# EAGLE board Stencil HV Board Main ECU (EAGLE 9.2.2), part 1 of 2
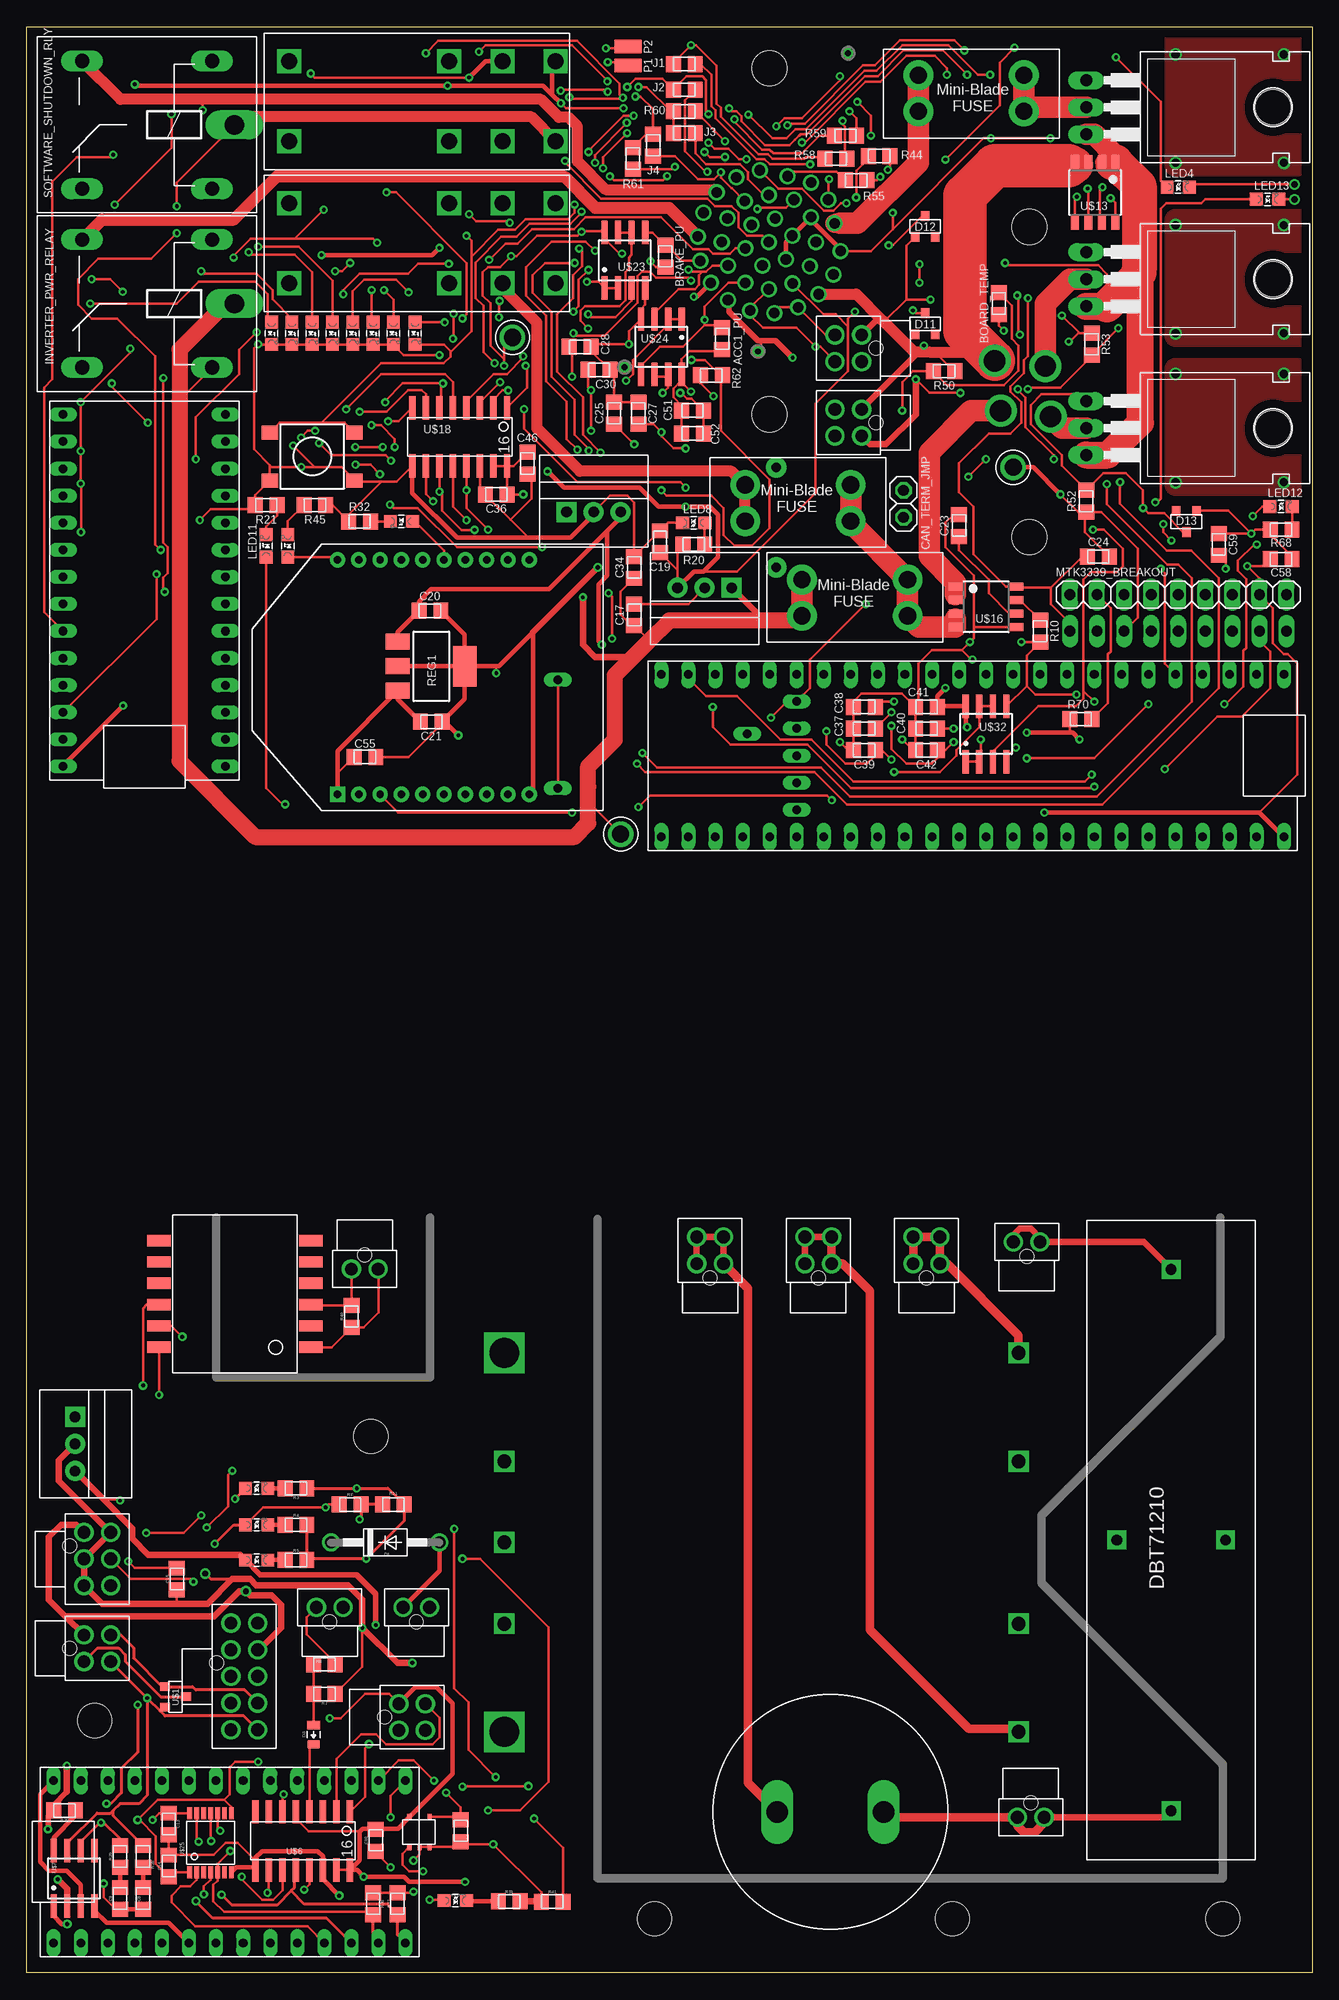
[diagram p0: board, top side]
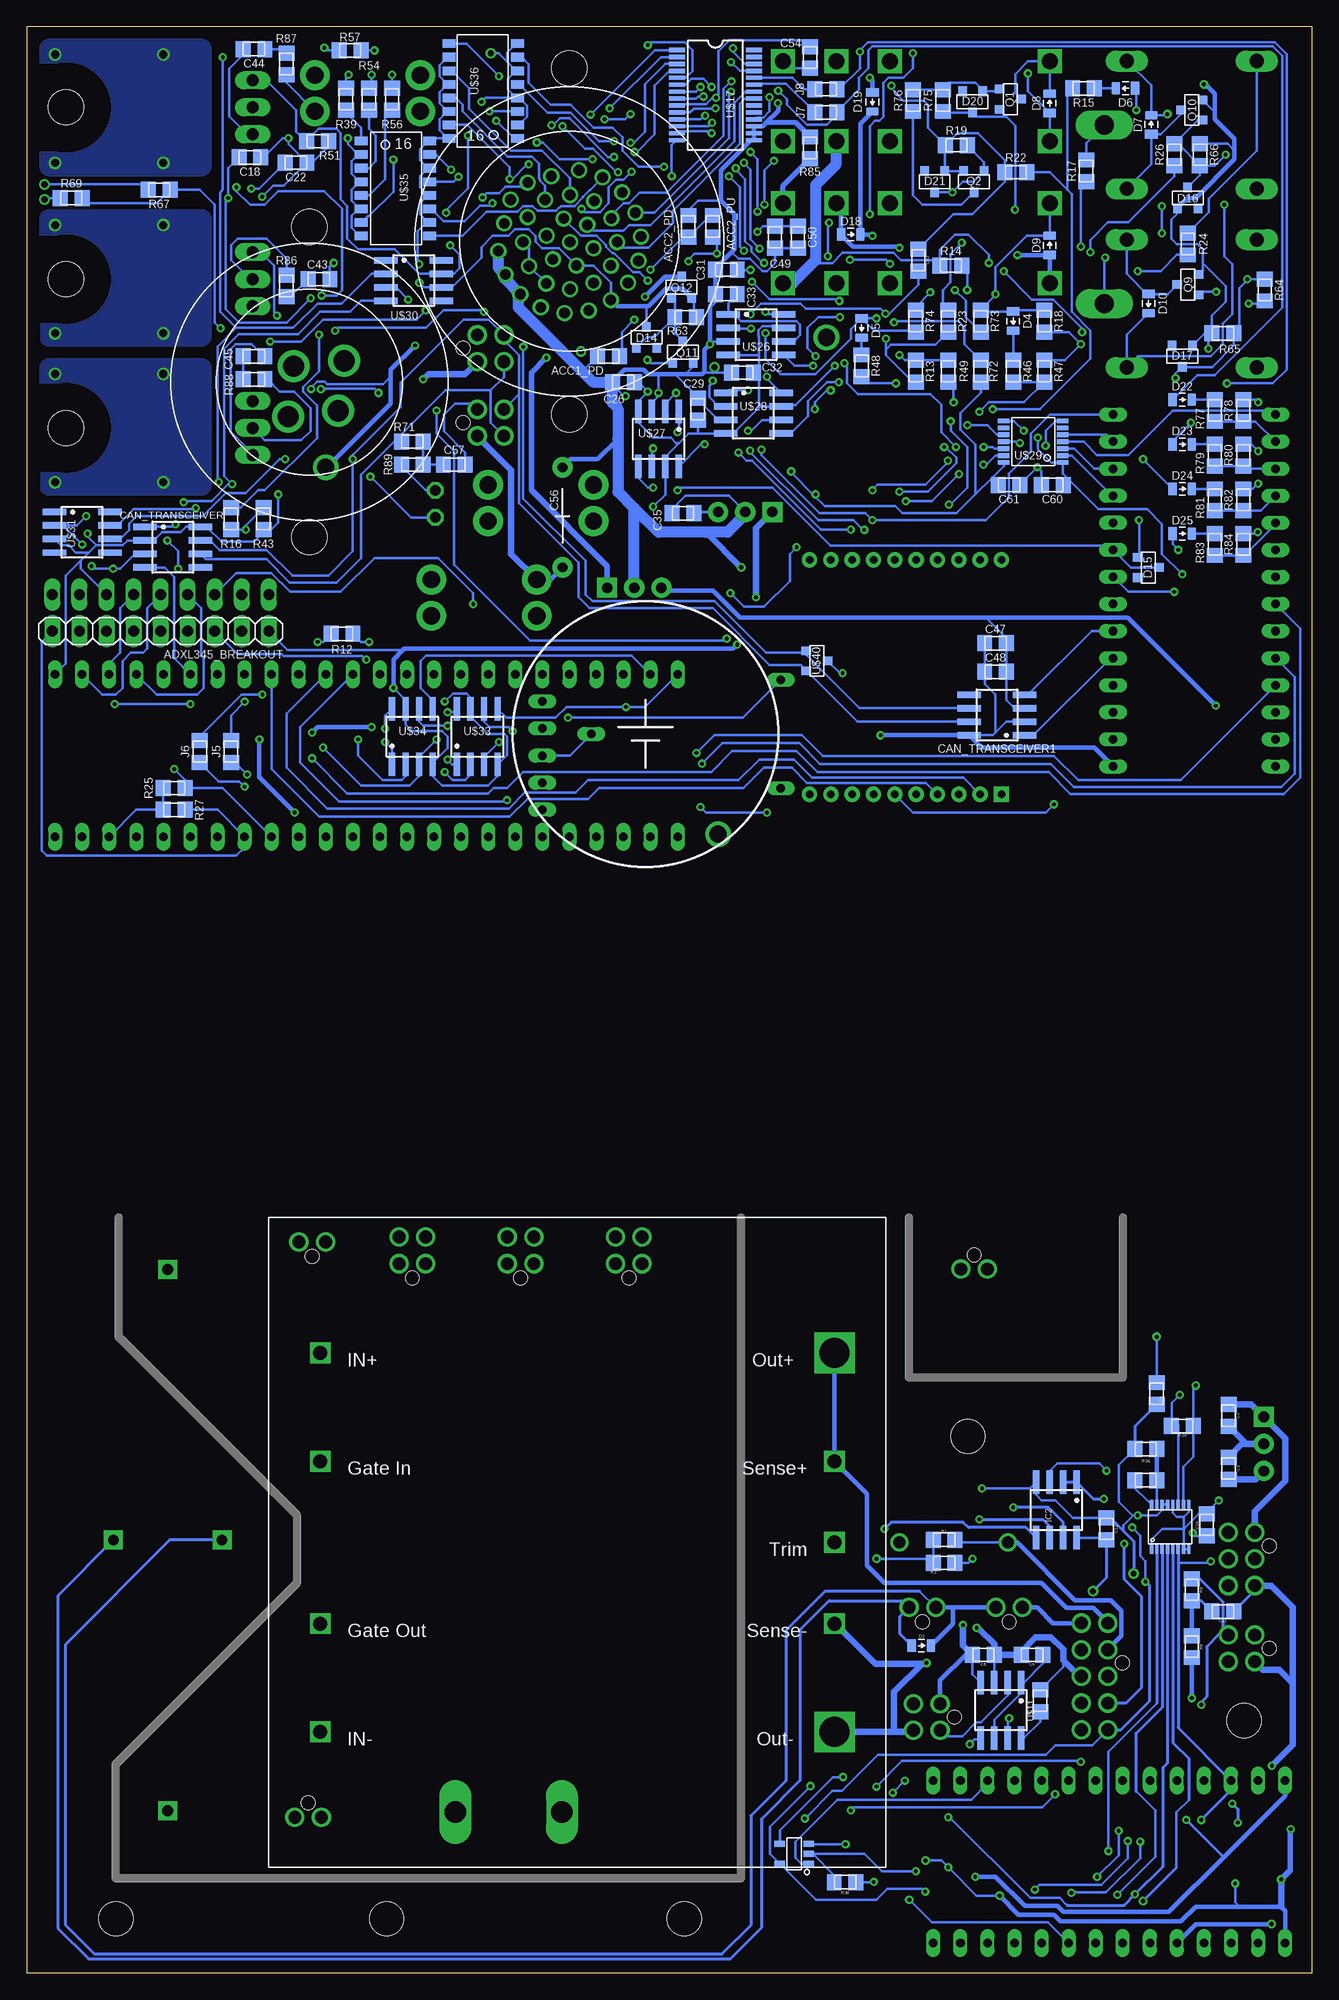
[diagram p1: board, bottom side, seen from below]

Size 120.65 x 182.63 mm. Coordinates in mm from the lower left corner, seen from the top.
Outline: 0,0 0,182.63 120.65,182.63 120.65,0 0,0
Copper layers (1*16): Top 0.035mm / dielectric 1.5mm / Bottom 0.035mm
Design rules "DRC Advanced Circuits": minimum track width 6mil, minimum drill 10mil, track to track 6mil, track to pad 6mil, pad to pad 6mil, via to via 6mil, smd to smd 6mil, copper to edge 40mil, drill to drill 6mil, minimum pad ring 10mil, minimum via ring 8mil, stop-mask expansion 4mil, vias tented up to drill 0mil, thermal gap 10mil
Net classes: 1 TS: clearance 8.5 mm to class 0; 2 ISO_SPI: clearance 8.5 mm to class 0, clearance 8.5 mm to class 1
Holes 3.2 mm at 86.87,5.08 6.4,23.67 112.27,5.08 58.93,5.08 32.31,50.34
tKeepout: area 29.3,47.3 to 35.3,53.3; area 3.4,20.7 to 9.4,26.7; area 55.9,2.1 to 61.9,8.1; area 83.9,2.1 to 89.9,8.1; area 109.3,2.1 to 115.3,8.1
bKeepout: area 109.3,2.1 to 115.3,8.1; area 83.9,2.1 to 89.9,8.1; area 55.9,2.1 to 61.9,8.1; area 3.4,20.7 to 9.4,26.7; area 29.3,47.3 to 35.3,53.3

## Footprints (pad centres in the part's own frame; a part is rotated, then mirrored left to right if it is on the bottom)
MINI-BLADE_FUSE_HOLDER = drill 1.613 pad 2.794: L1 0,3.404; L2 0,0; R1 9.906,3.404; R2 9.906,0
0805 = smd 1.4 x 1.5: 1 -1.025,0; 2 1.025,0
1X09 = drill 1.016 long: 1 -8.89,0; 2 -6.35,0; 3 -3.81,0; 4 -1.27,0; 5 1.27,0; 6 3.81,0; 7 6.35,0; 8 8.89,0; 9 11.43,0
LED-805 = smd 1.2 x 1.2: A 0,-1.05; C 0,1.05
RELAY_DPDT = drill 1.5 square: 2 10.008,0; 3 5.004,0; 4 0,0; 5 0,7.493; 6 5.004,7.493; 7 10.008,7.493; COIL+ 25.019,0; COIL- 25.019,7.493
LLS2V221MELZ = drill 2 long: P$1 -5,0; P$2 5,0
CAP-PTH-LARGE = drill 0.9 pad 1.905: 1 -4.826,0; 2 4.572,0
1X02_SLIM = drill 1.016 octagon: 1 -1.27,0; 2 1.27,0
SOIC-08 = smd 0.6 x 2.2: 1 -1.905,-2.6; 2 -0.635,-2.6; 3 0.635,-2.6; 4 1.905,-2.6; 5 1.905,2.6; 6 0.635,2.6; 7 -0.635,2.6; 8 -1.905,2.6
NANO-FIT_VERTICAL-4 = drill 1.2: P$1 -1.25,0; P$2 1.25,0; P$3 -1.25,2.5; P$4 1.25,2.5 | hole 1.3: 0,-1.34
DO-41 = drill 1.118: A 5.08,0; C -5.08,0
0805_D = smd 0.8 x 1.2: A -0.9,0; C 0.9,0
SOT23 = smd 0.8 x 0.9: 1 -0.95,-1; 2 0.95,-1; 3 0,1
NANO-FIT_VERTICAL-2 = drill 1.2: P$1 -1.25,0; P$2 1.25,0 | hole 1.3: 0,-1.34
OKI-78SR = drill 1 pad 1.88 square: 1 -2.54,0 | drill 1 pad 1.88: 2 0,0; 3 2.54,0
NANO-FIT_VERTICAL-6 = drill 1.2: P$1 -2.5,0; P$2 0,0; P$3 2.5,0; P$4 -2.5,2.5; P$5 0,2.5; P$6 2.5,2.5 | hole 1.3: -1.25,-1.34
ZF112 = drill 1.321 long: 1 4.064,14.884; 2 4.064,2.896; O 16.256,14.884; S 16.256,2.896 | drill 1.803 long: P 1.956,8.89
NANO-FIT_VERTICAL-10 = drill 1.2: P$1 -5,0; P$2 -2.5,0; P$3 0,0; P$4 2.5,0; P$5 5,0; P$6 -5,2.5; P$7 -2.5,2.5; P$8 0,2.5; P$9 2.5,2.5; P$10 5,2.5 | hole 1.3: -1.27,-1.34
SOLDER_PAD_XSMALL = smd 2.54 x 1.27: P$1 0,0
SOT223 = smd 1.5 x 2.235: 1 -2.3,-3.15; 2 0,-3.15; 3 2.3,-3.15 | smd 3.8 x 2.2: 4 0,3.15
TACTILE_SWITCH_SMD_6.2MM_TALL = smd 1.55 x 1.3: A1 -3.975,-2.25; A2 3.975,-2.25; B1 -3.975,2.25; B2 3.975,2.25
HM2102NLT = smd 1.067 x 2.184: P$1 0,0; P$2 2,0; P$3 4,0; P$4 6,0; P$5 8,0; P$6 10,0; P$7 10,14.25; P$8 8,14.25; P$9 6,14.25; P$10 4,14.25; P$11 2,14.25; P$12 0,14.25
SOT-23-5 = smd 1 x 0.55: 1 -1.35,0.95; 2 -1.35,0; 3 -1.35,-0.95; 4 1.35,-0.95; 5 1.35,0.95
DBT71210 = drill 1 pad 1.778 square: COIL+ 30,-13; COIL- 30,-2.8; CONTACT1 55.4,-7.9; CONTACT2 4.6,-7.9
HV_DCDC_VI-J71-CZ = drill 1.3 square: 1VIN+ 5.08,-12.7; 2GATEIN 5.08,-22.86; 3GATEOUT 5.08,-38.1; 4VIN- 5.08,-48.26; 6SENSE+ 53.34,-22.86; 7TRIM 53.34,-30.48; 8SENSE- 53.34,-38.1 | drill 2.8 square: 5VOUT+ 53.34,-12.7; 9VOUT- 53.34,-48.26
SOIC-16 = smd 0.6 x 2.2: 1 -4.445,-2.794; 2 -3.175,-2.794; 3 -1.905,-2.794; 4 -0.635,-2.794; 5 0.635,-2.794; 6 1.905,-2.794; 7 3.175,-2.794; 8 4.445,-2.794; 9 4.445,2.667; 10 3.175,2.667; 11 1.905,2.667; 12 0.635,2.667; 13 -0.635,2.667; 14 -1.905,2.667; 15 -3.175,2.667; 16 -4.445,2.667
MSOP-16 = smd 0.305 x 0.889: 1 -0.1,-0.5; 2 0.4,-0.5; 3 0.9,-0.5; 4 1.4,-0.5; 5 1.9,-0.5; 6 2.4,-0.5; 7 2.9,-0.5; 8 3.4,-0.5; 9 3.4,3.7; 10 2.9,3.7; 11 2.4,3.7; 12 1.9,3.7; 13 1.4,3.7; 14 0.9,3.7; 15 0.4,3.7; 16 -0.1,3.7
TEENSY_3.2_SIMPLE = drill 0.8 long: 3.3V 16.51,29.21; A0 16.51,3.81; A1 16.51,6.35; A2 16.51,8.89; A3 16.51,11.43; A4 16.51,13.97; A5 16.51,16.51; A6 16.51,19.05; A7 16.51,21.59; A8 16.51,24.13; A9 16.51,26.67; AGND 16.51,31.75; D0(RX1) 1.27,31.75; D1(TX1) 1.27,29.21; D2 1.27,26.67; D3(CANTX) 1.27,24.13; D4(CANRX) 1.27,21.59; D5 1.27,19.05; D6 1.27,16.51; D7(RX3) 1.27,13.97; D8(TX3) 1.27,11.43; D9(RX2) 1.27,8.89; D10(TX2) 1.27,6.35; D11 1.27,3.81; D12 1.27,1.27; D13 16.51,1.27; GND 1.27,34.29; VIN 16.51,34.29
SOT23-5 = smd 0.61 x 0.406: EN -2.794,0; GND -2.794,0.94; VCC 0,1.905; WDI 0,0; WDO -2.794,1.905
SOP8 = smd 0.76 x 1.27: 1 -1.905,-2.86; 2 -0.635,-2.86; 3 0.635,-2.86; 4 1.905,-2.86; 5 1.905,2.86; 6 0.635,2.86; 7 -0.635,2.86; 8 -1.905,2.86
TEENSY_3.5_EXT = drill 0.8 long: 3.3V 16.51,54.61; 3.3V_1 1.27,24.13; 3.3V_2 6.35,13.97; A0 16.51,29.21; A1 16.51,31.75; A2 16.51,34.29; A3 16.51,36.83; A4 16.51,39.37; A5 16.51,41.91; A6 16.51,44.45; A7 16.51,46.99; A8 16.51,49.53; A9 16.51,52.07; A12 1.27,3.81; A13 1.27,1.27; A14 16.51,1.27; A15 16.51,3.81; A16 16.51,6.35; A17 16.51,8.89; A18 16.51,11.43; A19 16.51,13.97; A20 16.51,16.51; A21 16.51,19.05; A22 16.51,21.59; AGND 16.51,57.15; D0(RX1) 1.27,57.15; D1(TX1) 1.27,54.61; D2 1.27,52.07; D3(CANTX) 1.27,49.53; D4(CANRX) 1.27,46.99; D5 1.27,44.45; D6 1.27,41.91; D7(RX3) 1.27,39.37; D8(TX3) 1.27,36.83; D9(RX2) 1.27,34.29; D10(TX2) 1.27,31.75; D11 1.27,29.21; D12 1.27,26.67; D13 16.51,26.67; D24 1.27,21.59; D25 1.27,19.05; D26 1.27,16.51; D27 1.27,13.97; D28 1.27,11.43; D29 1.27,8.89; D30 1.27,6.35; GND 1.27,59.69; GND_1 16.51,24.13; GND_2 8.89,13.97; PROG 11.43,13.97; RST 13.97,13.97; VBAT 3.81,13.97; VIN 16.51,59.69
XBEE = drill 0.7 pad 1.422 square: 1 -11,5.5 | drill 0.7 pad 1.422: 2 -11,3.5; 3 -11,1.5; 4 -11,-0.5; 5 -11,-2.5; 6 -11,-4.5; 7 -11,-6.5; 8 -11,-8.5; 9 -11,-10.5; 10 -11,-12.5; 11 11,-12.5; 12 11,-10.5; 13 11,-8.5; 14 11,-6.5; 15 11,-4.5; 16 11,-2.5; 17 11,-0.5; 18 11,1.5; 19 11,3.5; 20 11,5.5
SSOP28 = smd 0.4 x 1.5: 1 -4.225,-3.625; 2 -3.575,-3.625; 3 -2.925,-3.625; 4 -2.275,-3.625; 5 -1.625,-3.625; 6 -0.975,-3.625; 7 -0.325,-3.625; 8 0.325,-3.625; 9 0.975,-3.625; 10 1.625,-3.625; 11 2.275,-3.625; 12 2.925,-3.625; 13 3.575,-3.625; 14 4.225,-3.625; 15 4.225,3.625; 16 3.575,3.625; 17 2.925,3.625; 18 2.275,3.625; 19 1.625,3.625; 20 0.975,3.625; 21 0.325,3.625; 22 -0.325,3.625; 23 -0.975,3.625; 24 -1.625,3.625; 25 -2.275,3.625; 26 -2.925,3.625; 27 -3.575,3.625; 28 -4.225,3.625
TO-220-H-HOLE = drill 1.118 long: 1 -2.54,-6.35; 2 0,-6.35; 3 2.54,-6.35 | hole 3.302: 0,11.176
CR-2450/G1AN = drill 0.8 long: +_0 -5.08,12.7; +_1 5.08,12.7; - 0,-5.08
TSSOP-14 = smd 0.45 x 1.1: 1 -1.958,-2.618; 2 -1.308,-2.618; 3 -0.657,-2.618; 4 -0.007,-2.618; 5 0.642,-2.618; 6 1.292,-2.618; 7 1.942,-2.618; 8 1.942,2.918; 9 1.292,2.918; 10 0.642,2.918; 11 -0.007,2.918; 12 -0.657,2.918; 13 -1.308,2.918; 14 -1.958,2.918
11-11F1 = smd 0.8 x 1.2: 1 -4.445,-3.277; 2 -3.175,-3.277; 3 -1.905,-3.277; 4 -0.635,-3.277; 5 0.635,-3.277; 6 1.905,-3.277; 7 3.175,-3.277; 8 4.445,-3.277; 9 4.445,3.15; 10 3.175,3.15; 11 1.905,3.15; 12 0.635,3.15; 13 -0.635,3.15; 14 -1.905,3.15; 15 -3.175,3.15; 16 -4.445,3.15
TEST_POINT = drill 1.6: P$1 0,0
AUTOSPORT_14-35 = drill 1: P$1 1.143,6.655; P$2 3.124,5.512; P$3 5.359,4.064; P$4 6.452,2.032; P$5 6.756,-0.254; P$6 6.274,-2.489; P$7 5.08,-4.445; P$8 3.302,-5.893; P$9 1.143,-6.655; P$10 -1.143,-6.655; P$11 -3.302,-5.893; P$12 -5.08,-4.445; P$13 -6.274,-2.489; P$14 -6.756,-0.254; P$15 -6.452,2.032; P$16 -5.359,4.064; P$17 -3.124,5.512; P$18 -1.143,6.655; P$19 1.143,4.369; P$20 3.124,3.023; P$21 4.318,1.016; P$22 4.318,-1.27; P$23 3.124,-3.226; P$24 1.143,-4.369; P$25 -1.143,-4.369; P$26 -3.124,-3.226; P$27 -4.318,-1.27; P$28 -4.318,1.016; P$29 -3.124,3.023; P$30 -1.143,4.369; P$31 1.143,1.88; P$32 2.286,-0.102; P$33 1.143,-2.083; P$34 -1.143,-2.083; P$35 -2.286,-0.102; P$36 -1.143,1.88; P$37 0,-0.102 | hole 3.3: -11.491,-11.491; 11.491,11.491
AUTOSPORT_12-04 = drill 2: P$1 0,3.81; P$2 3.708,0.889; P$3 0,-2.108; P$4 -3.708,0.889 | hole 3.3: -10.288,-10.288; 10.288,10.288

## Placement (x,y rotation side)
5ABOARDFUSE  [MINI-BLADE_FUSE_HOLDER]  82.68,130.73 180 top
5AFUSE  [MINI-BLADE_FUSE_HOLDER]  83.69,174.68 0 top
5ASHUTDOWNFUSE  [MINI-BLADE_FUSE_HOLDER]  77.34,139.62 180 top
ACC1_PD  10k  [0805]  66.04,151.69 180 bottom
ACC1_PU  10k  [0805]  65.28,153.34 270 top
ACC2_PD  10k  [0805]  58.55,163.88 90 bottom
ACC2_PU  10k  [0805]  56.26,163.88 270 bottom
ADXL345_BREAKOUT  [1X09]  106.81,125.91 180 bottom
BMS-OK  GREEN  [LED-805]  21.59,42.04 270 top
BMS_SHUTDOWN_RLY  RT424012  [RELAY_DPDT]  49.66,179.37 180 top
BOARD_TEMP  THERMISTOR_NCP210805  [0805]  91.24,156.64 90 top
BRAKE_PU  10k  [0805]  59.94,161.09 270 top
C1  180µF  [LLS2V221MELZ]  75.43,15.1 180 top
C2  10uF  [0805]  7.85,52.3 270 bottom
C3  10uF  [0805]  7.85,47.35 90 bottom
C4  27pF  [0805]  14.61,54.36 270 bottom
C5  0.1uF  [0805]  30.86,29.84 0 bottom
C6  0.1uF  [0805]  26.29,29.84 180 bottom
C7  530pF  [0805]  25.53,25.53 90 bottom
C8  560pF  [0805]  10.92,6.99 90 top
C9  560pF  [0805]  8.76,6.99 90 top
C10  0.1uF  [0805]  32.77,12.45 270 top
C11  4.7nF  [0805]  8.38,33.91 180 bottom
C12  0.1uF  [0805]  19.3,41.66 90 bottom
C13  0.1uF  [0805]  13.34,13.97 270 top
C14  0.1uF  [0805]  13.34,10.03 90 top
C15  0.1uF  [0805]  14.1,36.96 90 top
C16  0.1uF  [0805]  9.91,42.04 90 bottom
C17  10uF  [0805]  57.02,127.43 270 top
C18  0.1uF  [0805]  99.69,170.36 0 bottom
C19  10uF  [0805]  59.44,134.29 270 top
C20  1uF  [0805]  37.85,127.81 0 top
C21  1uF  [0805]  37.97,117.4 180 top
C22  47nF  [0805]  95.38,169.85 0 bottom
C23  47nF  [0805]  87.5,135.81 90 top
C24  0.1uF  [0805]  100.58,132.89 0 top
C25  47nF  [0805]  55.12,146.35 90 top
C26  .1uF  [0805]  64.64,149.28 180 bottom
C27  .1uF  [0805]  57.4,146.35 270 top
C28  47nF  [0805]  51.94,152.58 0 top
C29  .1uF  [0805]  57.66,146.74 90 bottom
C30  .1uF  [0805]  53.72,150.42 180 top
C31  47nF  [0805]  54.99,159.82 180 bottom
C32  .1uF  [0805]  53.47,150.16 180 bottom
C33  .1uF  [0805]  54.99,157.53 0 bottom
C34  10uF  [0805]  57.02,131.88 270 top
C35  10uF  [0805]  59.05,136.96 0 bottom
C36  1uF  [0805]  44.07,138.73 0 top
C37  470pF  [0805]  78.61,116.76 180 top
C38  .1uF  [0805]  78.61,118.8 180 top
C39  .1uF  [0805]  78.61,114.73 0 top
C40  470pF  [0805]  84.45,116.76 180 top
C41  .1uF  [0805]  84.45,118.8 180 top
C42  .1uF  [0805]  84.45,114.73 0 top
C43  [0805]  93.22,158.93 0 bottom
C44  [0805]  99.31,180.52 180 bottom
C45  [0805]  99.31,151.69 0 bottom
C46  0.1uF  [0805]  46.99,141.66 90 top
C47  1uF  [0805]  29.72,124.76 0 bottom
C48  .1uF  [0805]  29.72,122.1 0 bottom
C49  1uF  [0805]  50.42,162.86 90 bottom
C50  .1uF  [0805]  48.26,162.86 90 bottom
C51  1uF  [0805]  62.48,146.61 0 top
C52  .1uF  [0805]  62.48,144.45 0 top
C53  1uF  [0805]  36.96,160.71 270 bottom
C54  0.1uF  [0805]  47.12,179.73 270 bottom
C55  0.1uF  [0805]  31.75,114.1 0 top
C56  470uF  [CAP-PTH-LARGE]  70.36,136.7 90 bottom
C57  4.7nF  [0805]  80.52,141.53 0 bottom
C58  1uF  [0805]  117.73,132.64 180 top
C59  .1uF  [0805]  111.89,134.04 270 top
C60  .1uF  [0805]  24.38,139.62 180 bottom
C61  .1uF  [0805]  28.45,139.62 0 bottom
CAN_TERM_JMP  M02_SLIM  [1X02_SLIM]  82.3,137.85 90 top
CAN_TRANSCEIVER  MCP2551  [SOIC-08]  106.93,133.78 270 bottom
CAN_TRANSCEIVER1  MCP2551  [SOIC-08]  29.59,118.03 90 bottom
CURRENT  CURRENT  [NANO-FIT_VERTICAL-4]  34.92,24 270 top
D1  DIODE  [DO-41]  33.66,40.39 0 top
D2  TS4148 RYG  [0805_D]  36.68,30.71 0 bottom
D3  TS4148 RYG  [0805_D]  26.92,22.35 270 top
D4  TS4148 RYG  [0805_D]  28.07,154.99 270 bottom
D5  TS4148 RYG  [0805_D]  42.29,154.36 270 bottom
D6  TS4148 RYG  [0805_D]  17.53,176.83 180 bottom
D7  TS4148 RYG  [0805_D]  15.11,173.43 90 bottom
D8  TS4148 RYG  [0805_D]  24.64,175.44 90 bottom
D9  TS4148 RYG  [0805_D]  24.64,162.1 90 bottom
D10  TS4148 RYG  [0805_D]  15.37,156.64 270 bottom
D11  MMBZ5246BLT1G  [SOT23]  84.33,154.74 0 top
D12  MMBZ5246BLT1G  [SOT23]  84.33,163.88 0 top
D13  MMBZ5246BLT1G  [SOT23]  108.84,136.19 180 top
D14  MMBZ5246BLT1G  [SOT23]  62.48,153.47 0 bottom
D15  MMBZ5246BLT1G  [SOT23]  15.37,131.88 270 bottom
D16  MMBZ5246BLT1G  [SOT23]  11.68,166.55 0 bottom
D17  MMBZ5246BLT1G  [SOT23]  12.19,151.69 180 bottom
D18  TS4148 RYG  [0805_D]  43.31,163.12 0 bottom
D19  TS4148 RYG  [0805_D]  41.27,175.56 270 bottom
D20  MMBZ5246BLT1G  [SOT23]  31.88,175.56 180 bottom
D21  MMBZ5246BLT1G  [SOT23]  35.43,168.07 180 bottom
D22  TS4148 RYG  [0805_D]  12.19,147.62 0 bottom
D23  TS4148 RYG  [0805_D]  12.19,143.43 0 bottom
D24  TS4148 RYG  [0805_D]  12.19,139.24 0 bottom
D25  TS4148 RYG  [0805_D]  12.19,135.05 0 bottom
DISCH+  DISCHARGE+  [NANO-FIT_VERTICAL-2]  93.85,68.58 0 top
HV+FUSED_1A-IMD+  HV+  [NANO-FIT_VERTICAL-4]  84.45,66.55 0 top
HV+UNFUSED  HV+UNFUSED  [NANO-FIT_VERTICAL-2]  94.23,14.61 180 top
HV-FUSED_1A-IMD-  HV-  [NANO-FIT_VERTICAL-4]  74.3,66.55 0 top
HV-UNFUSED_DISCHARGE-  HV-UNFUSED  [NANO-FIT_VERTICAL-4]  64.14,66.55 0 top
IC1  OKI-78SR-5  [OKI-78SR]  4.55,49.63 270 top
IC2  NE5532SOIC  [SOIC-08]  24,43.43 180 bottom
IMD  CONNECTOR-6NANO-FIT_VERTICAL-6  [NANO-FIT_VERTICAL-6]  5.38,38.84 270 top
IMD-OK  YELLOW  [LED-805]  21.59,45.47 270 top
IMD_SHUTDOWN_RLY  RT424009  [RELAY_DPDT]  49.66,166.04 180 top
INTERLOCK  INTERLOCK  [NANO-FIT_VERTICAL-2]  28.45,34.29 0 top
INVERTER_PWR_RELAY  G5LE  [ZF112]  21.46,165.53 180 top
ISO_SPI  ISO_SPI  [NANO-FIT_VERTICAL-2]  31.73,66.04 180 top
J1  JUMPER  [0805]  61.72,179.12 180 top
J2  JUMPER  [0805]  61.72,176.71 180 top
J3  JUMPER  [0805]  61.72,172.64 180 top
J4  JUMPER  [0805]  58.8,171.5 90 top
J5  JUMPER  [0805]  101.47,114.6 90 bottom
J6  JUMPER  [0805]  104.39,114.6 90 bottom
J7  JUMPER  [0805]  45.64,174.57 180 bottom
J8  JUMPER  [0805]  45.64,176.76 180 bottom
LED  BLUE  [LED-805]  40.23,6.78 270 top
LED1  White  [LED-805]  36.45,153.85 180 top
LED3  Green  [LED-805]  30.61,153.85 180 top
LED4  Red  [LED-805]  108.08,167.56 270 top
LED5  Yellow  [LED-805]  32.51,153.85 180 top
LED6  Red  [LED-805]  22.99,153.85 180 top
LED7  Green  [LED-805]  28.7,153.85 180 top
LED8  Purple  [LED-805]  62.61,136.07 90 top
LED9  Yellow  [LED-805]  34.42,153.85 180 top
LED10  Red  [LED-805]  35.18,136.19 90 top
LED11  Green  [LED-805]  22.48,133.91 0 top
LED12  Red  [LED-805]  117.73,137.59 270 top
LED13  Red  [LED-805]  116.46,166.42 270 top
LED14  Blue  [LED-805]  24.51,133.91 0 top
LED17  Red  [LED-805]  26.8,153.85 180 top
LED18  Red  [LED-805]  24.89,153.85 180 top
MAIN  MAIN  [NANO-FIT_VERTICAL-10]  19.18,27.81 270 top
MTK3339_BREAKOUT  [1X09]  106.81,129.34 0 top
ON-LED  PURPLE  [LED-805]  21.59,38.73 270 top
P1  SOLDER_PAD  [SOLDER_PAD_XSMALL]  56.44,178.97 0 top
P2  SOLDER_PAD  [SOLDER_PAD_XSMALL]  56.44,180.75 0 top
POWER  POWER  [NANO-FIT_VERTICAL-4]  5.38,30.45 270 top
Q1  P-CHANNEL_MOSFET_DMP3099L-7  [SOT23]  28.32,175.82 270 bottom
Q2  [SOT23]  31.75,168.07 180 bottom
Q9  [SOT23]  11.68,158.42 90 bottom
Q10  [SOT23]  11.3,174.8 90 bottom
Q11  [SOT23]  59.05,152.07 0 bottom
Q12  P-CHANNEL_MOSFET_DMP3099L-7  [SOT23]  59.18,158.17 0 bottom
R1  43k  [0805]  34.54,40.64 180 bottom
R2  12k  [0805]  34.54,38.48 180 bottom
R3  820  [0805]  25.27,45.47 180 top
R4  5k  [0805]  25.27,42.04 0 top
R5  270  [0805]  25.27,38.73 0 top
R6  43k  [0805]  27.94,28.96 180 top
R7  12k  [0805]  27.94,26.16 180 top
R8  60  [0805]  11.3,30.61 270 bottom
R9  60  [0805]  11.3,35.94 90 bottom
R10  1K  [0805]  95.12,125.91 270 top
R11  1k  [0805]  34.42,43.94 180 top
R12  2K  [0805]  91.06,125.65 180 bottom
R13  12k  [0805]  37.21,150.29 90 bottom
R14  2k  [0805]  33.91,160.2 0 bottom
R15  43k  [0805]  21.46,176.83 180 bottom
R16  1K  [0805]  101.47,136.45 270 bottom
R17  20k  [0805]  21.21,169.09 270 bottom
R18  2k  [0805]  25.15,154.99 270 bottom
R19  10k  [0805]  33.4,171.5 180 bottom
R20  270  [0805]  62.61,134.04 0 top
R21  33  [0805]  22.48,137.72 0 top
R22  12k  [0805]  27.81,168.96 180 bottom
R23  43k  [0805]  34.16,154.99 270 bottom
R24  6.8k  [0805]  11.68,162.23 270 bottom
R25  4.7k  [0805]  106.81,111.18 180 bottom
R26  1.2K  [0805]  12.95,170.61 270 bottom
R27  4.7k  [0805]  106.81,109.14 180 bottom
R28  100  [0805]  10.92,10.92 90 top
R29  100  [0805]  8.76,10.92 90 top
R30  1k  [0805]  3.56,15.24 0 top
R31  43  [0805]  45.29,6.71 0 top
R32  1.2k  [0805]  31.24,136.19 0 top
R33  1k  [0805]  15.62,46.23 0 bottom
R34  1k  [0805]  15.62,49.15 180 bottom
R35  120  [0805]  12.19,51.31 180 bottom
R36  2k  [0805]  32.51,6.48 270 top
R37  2k  [0805]  34.8,6.48 270 top
R38  430  [0805]  43.84,8.51 180 bottom
R39  150  [0805]  90.68,175.82 270 bottom
R40  100  [0805]  30.48,61.59 90 top
R41  2k  [0805]  49.33,6.68 180 top
R42  10k  [0805]  40.74,13.34 270 top
R43  2K  [0805]  98.42,136.45 90 bottom
R44  0  [0805]  80.01,170.48 180 top
R45  0  [0805]  27.05,137.72 180 top
R46  43k  [0805]  28.07,150.29 270 bottom
R47  12k  [0805]  25.15,150.29 90 bottom
R48  43k  [0805]  42.29,150.8 270 bottom
R49  12k  [0805]  34.16,150.29 90 bottom
R50  10k  [0805]  86.11,150.29 180 top
R51  10k  [0805]  93.34,171.88 180 bottom
R52  10k  [0805]  99.44,138.1 90 top
R53  10k  [0805]  99.95,152.83 90 top
R54  150  [0805]  88.52,175.82 270 bottom
R55  0  [0805]  77.85,168.2 180 top
R56  150  [0805]  86.36,175.82 270 bottom
R57  150  [0805]  90.3,180.39 180 bottom
R58  150  [0805]  75.95,170.23 0 top
R59  150  [0805]  76.83,172.39 0 top
R60  150  [0805]  61.72,174.68 0 top
R61  150  [0805]  56.9,170.26 270 top
R62  10k  [0805]  64.26,149.91 0 top
R63  10k  [0805]  58.8,155.37 180 bottom
R64  1.2k  [0805]  4.45,157.91 270 bottom
R65  10k  [0805]  8.38,153.85 180 bottom
R66  10k  [0805]  10.54,170.61 90 bottom
R67  1.2k  [0805]  108.2,167.31 0 bottom
R68  1.2k  [0805]  117.73,135.43 180 top
R69  1.2k  [0805]  116.46,166.55 0 bottom
R70  10k  [0805]  98.93,117.65 0 top
R71  60  [0805]  84.45,143.69 0 bottom
R72  5.1k  [0805]  31.11,150.29 90 bottom
R73  2k  [0805]  31.11,154.99 270 bottom
R74  33  [0805]  37.21,154.99 90 bottom
R75  10k  [0805]  34.67,175.69 90 bottom
R76  1k  [0805]  37.47,175.69 90 bottom
R77  43k  [0805]  9.14,146.61 270 bottom
R78  12k  [0805]  6.48,146.61 90 bottom
R79  43k  [0805]  9.14,142.42 270 bottom
R80  12k  [0805]  6.48,142.42 90 bottom
R81  43k  [0805]  9.14,138.23 270 bottom
R82  12k  [0805]  6.48,138.23 90 bottom
R83  43k  [0805]  9.14,134.04 270 bottom
R84  12k  [0805]  6.48,134.04 90 bottom
R85  20  [0805]  47.14,171.25 90 bottom
R86  [0805]  96.27,158.29 270 bottom
R87  [0805]  96.27,179.12 90 bottom
R88  [0805]  99.31,149.53 180 bottom
R89  60  [0805]  84.45,141.53 180 bottom
REG  5V  [OKI-78SR]  63.63,129.97 180 top
REG1  LM3940  [SOT223]  37.97,122.61 270 top
REG3  5V  [OKI-78SR]  53.21,137.08 0 top
RELAYS  RELAYS  [NANO-FIT_VERTICAL-2]  36.58,34.29 0 top
RF  2k  [0805]  30.35,43.94 180 top
S1  [TACTILE_SWITCH_SMD_6.2MM_TALL]  26.8,142.29 180 top
SOFTWARE_SHUTDOWN_RLY  G5LE  [ZF112]  21.46,182.3 180 top
U$1  CDSOT23-T24CAN-Q  [SOT23]  13.97,25.91 270 top
U$2  HM2102NLT  [HM2102NLT]  26.67,58.71 90 top
U$3  SN74LVC1G08  [SOT-23-5]  48.62,11.18 180 bottom
U$4  [DBT71210]  115.32,70.61 270 top
U$5  HV_DCDC_VI-J71-CZ  [HV_DCDC_VI-J71-CZ]  98.17,70.87 0 bottom
U$6  MCP3208SOIC  [SOIC-16]  25.91,12.32 180 top
U$7  MCP2551  [SOIC-08]  4.45,8.86 0 top
U$8  LTC6820  [MSOP-16]  14.99,40.26 0 bottom
U$9  TEENSY_3.2_SIMPLE  [TEENSY_3.2_SIMPLE]  36.83,1.52 90 top
U$10  STWD100  [SOT23-5]  37.82,14.61 90 top
U$11  MAX7480  [SOIC-08]  29.21,24.64 180 bottom
U$12  TEENSY_3.2_SIMPLE  [TEENSY_3.2_SIMPLE]  19.94,147.5 180 top
U$13  ACS715_CURRENT_SENSOR  [SOP8]  100.28,167.06 180 top
U$14  TEENSY_3.5_EXT  [TEENSY_3.5_EXT]  58.29,123.11 270 top
U$15  XBEE  [XBEE]  34.67,121.59 90 top
U$16  ACS715_CURRENT_SENSOR  [SOP8]  90.04,128.19 270 top
U$17  MCP23S17SSOP28  [SSOP28]  56.01,176.2 270 bottom
U$18  MCP3208SOIC  [SOIC-16]  40.64,144.07 180 top
U$19  N-CHANNEL_MOSFET_IRF1324PBF  [TO-220-H-HOLE]  105.79,158.93 270 top
U$20  N-CHANNEL_MOSFET_IRF1324PBF  [TO-220-H-HOLE]  105.79,175.06 270 top
U$21  N-CHANNEL_MOSFET_IRF1324PBF  [TO-220-H-HOLE]  105.79,144.96 270 top
U$22  CR-2450/G1AN  [CR-2450/G1AN]  62.56,116.26 270 bottom
U$23  MCP6002SOIC  [SOIC-08]  56.13,160.71 0 top
U$24  MCP6002SOIC  [SOIC-08]  59.56,152.58 180 top
U$25  TXB0104TSSOP  [TSSOP-14]  17.27,12.06 0 top
U$26  [SOIC-08]  52.2,153.72 270 bottom
U$27  [SOIC-08]  61.34,143.94 180 bottom
U$28  [SOIC-08]  52.45,146.35 270 bottom
U$29  TXB0104TSSOP  [TSSOP-14]  26.04,143.69 90 bottom
U$30  MC34152  [SOIC-08]  84.33,158.8 270 bottom
U$31  MC34152  [SOIC-08]  115.44,135.18 270 bottom
U$32  MCP6002SOIC  [SOIC-08]  90.04,116.26 0 top
U$33  [SOIC-08]  78.36,116 0 bottom
U$34  [SOIC-08]  84.45,116 0 bottom
U$35  TLP291-4  [11-11F1]  85.98,167.44 270 bottom
U$36  TLP291-4  [11-11F1]  77.85,176.58 90 bottom
U$37  TEST_POINT  [TEST_POINT]  55.75,106.86 0 top
U$38  TEST_POINT  [TEST_POINT]  45.59,153.47 0 top
U$39  TEST_POINT  [TEST_POINT]  92.58,141.27 0 top
U$40  CDSOT23-T24CAN-Q  [SOT23]  46.48,123.11 270 bottom
X1  CONNECTOR-37  [AUTOSPORT_14-35]  69.72,162.48 45 bottom
X2  CONNECTOR-4AUTOSPORT  [AUTOSPORT_12-04]  94.11,149.28 225 bottom
X3  CONNECTOR-4NANO-FIT-VERTICAL-4  [NANO-FIT_VERTICAL-4]  78.36,152.45 90 top
X4  CONNECTOR-4NANO-FIT-VERTICAL-4  [NANO-FIT_VERTICAL-4]  78.36,145.47 90 top

## Library data of the parts
5ABOARDFUSE 5AFUSE 5ASHUTDOWNFUSE ACC1_PD ACC1_PU ACC2_PD ACC2_PU ADXL345_BREAKOUT BMS-OK BMS_SHUTDOWN_RLY BOARD_TEMP BRAKE_PU C1-C61 CAN_TERM_JMP CAN_TRANSCEIVER CAN_TRANSCEIVER1 CURRENT D1-D25 DISCH+ HV+FUSED_1A-IMD+ HV+UNFUSED HV-FUSED_1A-IMD- HV-UNFUSED_DISCHARGE- IC1 IC2 IMD IMD-OK IMD_SHUTDOWN_RLY INTERLOCK INVERTER_PWR_RELAY ISO_SPI J1-J8 LED LED1 LED3-LED14 LED17 LED18 MAIN MTK3339_BREAKOUT ON-LED P1 P2 POWER Q1 Q2 Q9-Q12 R1-R89 REG REG1 REG3 RELAYS RF S1 SOFTWARE_SHUTDOWN_RLY U$1-U$36 U$40 X1-X4 = HyTechDevices
U$37 = HyTechDevices; SIG: +12V
U$38 = HyTechDevices; SIG: +5V
U$39 = HyTechDevices; SIG: GND

## Nets
3.3V: R25.2 R27.2 U$14.3.3V
3.3V_MAIN_TEENSY: C60.1 U$12.3.3V U$29.1 U$29.8
12VIN: U$16.1 U$16.2 X2.P$1
12VSUPPLY_DIV: C53.2 R13.1 R23.2 U$23.3
12VSUPPLY_READ: U$18.4 U$23.1 U$23.2
12VUNFUSED: 5ABOARDFUSE.L1 5ABOARDFUSE.L2 5ASHUTDOWNFUSE.L1 5ASHUTDOWNFUSE.L2 U$16.3 U$16.4
+3V3: C14.1 C15.2 R36.1 R37.1 U$3.5 U$8.6 U$9.3.3V U$25.1 U$25.8
+5V: C3.1 C5.1 C10.1 C13.1 C16.2 CURRENT.P$1 IC1.3 ON-LED.A R38.1 U$6.5 U$6.15 U$6.16 U$7.3 U$8.1 U$8.7 U$8.8 U$8.9 U$8.12 U$9.VIN U$10.VCC U$11.4 U$11.7 U$25.14
+5V1: ACC1_PU.2 ACC2_PU.2 BOARD_TEMP.1 BRAKE_PU.2 C19.2 C26.1 C29.1 C32.1 C36.2 C46.2 C47.2 C48.2 C49.2 C50.2 C51.1 C52.1 C54.1 C61.1 CAN_TRANSCEIVER1.3 R20.1 R72.1 REG.3 U$12.VIN U$17.9 U$17.18 U$18.15 U$18.16 U$23.8 U$24.8 U$26.4 U$26.7 U$27.4 U$27.7 U$28.4 U$28.7 U$29.14 U$38.P$1 X1.P$27 X1.P$28 X1.P$29
+12V: C2.1 C12.1 IC1.1 IC2.8 IMD.P$1 MAIN.P$7 POWER.P$1
+12V1: 5ABOARDFUSE.R1 5ABOARDFUSE.R2 C17.2 C34.2 C56.1 D7.C D10.C D14.3 D20.3 INVERTER_PWR_RELAY.1 INVERTER_PWR_RELAY.P Q1.2 Q12.2 R23.1 R63.1 R75.1 REG3.1 REG.1 SOFTWARE_SHUTDOWN_RLY.2 U$30.6 U$31.6 U$35.10 U$35.12 U$35.14 U$35.16 U$36.10 U$36.12 U$36.14 U$36.16 U$37.P$1 X1.P$10 X1.P$34 X3.P$1 X4.P$1
BMS_OK: D5.A D21.3 Q2.1 R19.1 R74.1 X1.P$31
BMS_OK_3.3V: IC2.5 U$3.4
BMS_OK_10V: BMS-OK.A IC2.7 MAIN.P$4 RF.2
BMS_OK_READ: R48.2 R49.1 U$18.6
BMS_OK_SW: BMS_SHUTDOWN_RLY.COIL+ D8.C Q1.3
BMS_PWR_STEP: BMS_SHUTDOWN_RLY.3 BMS_SHUTDOWN_RLY.COIL- D8.A D19.A
BRAKE_LIGHT: Q12.3 X1.P$9
BRAKE_LIGHT_CTRL: D15.3 Q11.1 R62.2 U$12.D7(RX3)
CANH: MAIN.P$10 POWER.P$4 R8.2 R28.2 U$1.2 U$7.7
CANH1: CAN_TERM_JMP.1 CAN_TRANSCEIVER1.7 CAN_TRANSCEIVER.7 U$40.2 X1.P$12 X1.P$13 X3.P$4 X4.P$4
CANL: MAIN.P$9 POWER.P$3 R9.2 R29.2 U$1.1 U$7.6
CANL1: CAN_TRANSCEIVER1.6 CAN_TRANSCEIVER.6 R71.1 U$40.1 X1.P$11 X1.P$26 X3.P$3 X4.P$3
CHARGE_ENABLE: D1.C MAIN.P$2 R1.1
COOLINGSENSE: J5.2 R16.2 R43.2 U$32.3
COOLINGSENSE_FILT: J5.1 U$14.A12 U$34.5
CS1_5V: U$18.10 U$29.13
CS1_TEENSY: U$12.D9(RX2) U$29.2
CS2_5V: U$17.11 U$29.12
CS2_TEENSY: U$12.D10(TX2) U$29.3
CS_LTC6820: U$8.5 U$9.D10(TX2)
CS_MCP3208_3.3V: U$9.D9(RX2) U$25.2
CUR_SENSE: CURRENT.P$2 U$11.2
CURRENTSENSE2: C43.2 C44.2 C45.2 U$13.1 U$13.2 U$19.3 U$20.3 U$21.3
DASH11_READ: R77.2 R78.1 U$12.A0
DASH12_READ: R79.2 R80.1 U$12.A1
DASH_1_EXTERN: R44.2 X1.P$1
DASH_1_INTER: R39.1 U$17.1
DASH_2_EXTERN: R55.2 X1.P$2
DASH_2_INTER: R54.1 U$17.2
DASH_3_EXTERN: U$35.11 X1.P$3
DASH_3_INTER: R56.1 U$17.3
DASH_4_EXTERN: U$35.9 X1.P$4
DASH_4_INTER: R57.1 U$17.4
DASH_5_EXTERN: J1.1 U$36.15 X1.P$18
DASH_5_INTER: J1.2 R58.1 U$17.5
DASH_6_EXTERN: J2.1 U$36.13 X1.P$19
DASH_6_INTER: J2.2 R59.1 U$17.6
DASH_7_EXTERN: J3.1 U$36.11 X1.P$20
DASH_7_INTER: J3.2 R60.1 U$17.7
DASH_8_EXTERN: J4.1 U$36.9 X1.P$21
DASH_8_INTER: J4.2 R61.1 U$17.8
DASH_9_EXTERN: U$17.21 X1.P$23
DASH_10_EXTERN: U$17.22 X1.P$32
DASH_11_EXTERN: D22.A J7.1 X1.P$6
DASH_11_INTER: J7.2 U$17.23
DASH_12_EXTERN: D23.A J8.1 X1.P$22
DASH_12_INTER: J8.2 U$17.24
DISCHARGE_RELAY_GND: D2.A RELAYS.P$2 U$4.COIL-
ECUSENSE: J6.2 R10.2 R12.2 U$32.5
ECUSENSE_FILT: J6.1 U$14.A13 U$33.5
FAN1-: 5AFUSE.R1 5AFUSE.R2 R87.1 U$20.2
FAN1CONTROL: LED4.A U$12.A8 U$30.2
FAN1DRIVE: D12.3 R51.2 U$20.1 U$30.7
FAN2-: R86.1 U$19.2 X2.P$3
FAN2CONTROL: LED13.A U$12.A9 U$30.4
FAN2DRIVE: D11.3 R53.2 U$19.1 U$30.5
GND: C2.2 C3.2 C4.2 C5.2 C6.2 C7.2 C8.1 C9.1 C10.2 C11.1 C12.2 C13.2 C14.2 C15.1 C16.1 CURRENT.P$4 IC1.2 IC2.4 IMD.P$2 IMD.P$3 IMD.P$4 MAIN.P$8 POWER.P$2 R2.1 R3.1 R4.2 R5.2 R7.1 R11.1 R30.1 R31.2 R34.2 R41.2 R42.2 U$1.3 U$3.3 U$5.8SENSE- U$5.9VOUT- U$6.9 U$6.14 U$7.2 U$8.13 U$8.14 U$9.GND U$10.EN U$10.GND U$11.3 U$25.7
GND1: ACC1_PD.2 ACC2_PD.2 ADXL345_BREAKOUT.3 BMS_SHUTDOWN_RLY.4 C17.1 C18.2 C19.1 C20.2 C21.1 C22.2 C23.2 C24.2 C25.2 C26.2 C27.1 C28.2 C29.2 C30.1 C31.2 C32.2 C33.1 C34.1 C35.1 C36.1 C37.2 C38.2 C39.1 C40.2 C41.2 C42.1 C46.1 C47.1 C48.1 C49.1 C50.1 C51.2 C52.2 C53.1 C54.2 C55.2 C56.2 C57.2 C58.1 C59.1 C60.2 C61.2 CAN_TRANSCEIVER1.2 CAN_TRANSCEIVER1.8 CAN_TRANSCEIVER.2 CAN_TRANSCEIVER.8 D11.1 D12.1 D13.1 D15.1 D16.1 D17.1 D21.1 LED3.C LED5.C LED6.C LED7.C LED8.C LED9.C LED17.C LED18.C MTK3339_BREAKOUT.7 Q2.2 Q9.2 Q10.2 Q11.2 R12.1 R13.2 R18.2 R19.2 R21.1 R22.2 R32.1 R43.1 R45.1 R47.2 R49.2 R50.1 R51.1 R52.1 R53.1 R62.1 R65.2 R66.2 R67.2 R68.2 R69.2 R78.2 R80.2 R82.2 R84.2 R85.2 REG1.2 REG1.4 REG3.2 REG.2 S1.B1 S1.B2 U$12.GND U$13.3 U$13.4 U$13.5 U$14.GND U$15.10 U$16.5 U$17.10 U$17.15 U$17.16 U$17.17 U$18.9 U$18.14 U$23.4 U$24.4 U$26.3 U$27.3 U$28.3 U$29.7 U$30.3 U$31.3 U$32.4 U$33.3 U$34.3 U$35.2 U$35.4 U$35.6 U$35.8 U$36.2 U$36.4 U$36.6 U$36.8 U$39.P$1 U$40.3 X1.P$14 X1.P$15 X1.P$16 X1.P$30 X1.P$35 X1.P$36 X2.P$4 X3.P$2 X4.P$2
HV+FUSED_1A [TS]: HV+FUSED_1A-IMD+.P$1 HV+FUSED_1A-IMD+.P$2 HV+FUSED_1A-IMD+.P$3 HV+FUSED_1A-IMD+.P$4 U$5.1VIN+
HV+UNFUSED [TS]: C1.P$1 HV+UNFUSED.P$1 HV+UNFUSED.P$2 U$4.CONTACT1
HV+UNFUSED_FSAE_DISCHARGE [TS]: DISCH+.P$1 DISCH+.P$2 U$4.CONTACT2
HV-FUSED_1A [TS]: HV-FUSED_1A-IMD-.P$1 HV-FUSED_1A-IMD-.P$2 HV-FUSED_1A-IMD-.P$3 HV-FUSED_1A-IMD-.P$4 U$5.4VIN-
HV-UNFUSED [TS]: C1.P$2 HV-UNFUSED_DISCHARGE-.P$1 HV-UNFUSED_DISCHARGE-.P$2 HV-UNFUSED_DISCHARGE-.P$3 HV-UNFUSED_DISCHARGE-.P$4
IM: R35.1 U$2.P$10 U$8.10
IMD_PWR_STEP: D9.A D18.A IMD_SHUTDOWN_RLY.3 IMD_SHUTDOWN_RLY.COIL-
INVERTER_CTRL: D17.3 Q9.1 R64.1 R65.1 U$12.D6
INVERTER_SUPPLY: INVERTER_PWR_RELAY.S X1.P$7
IP: R35.2 U$2.P$12 U$8.11
ISOSPI-M [ISO_SPI]: ISO_SPI.P$2 R40.2 U$2.P$3
ISOSPI-P [ISO_SPI]: ISO_SPI.P$1 R40.1 U$2.P$1
LATCH_EXT_BUTTON: D18.C D19.C LED1.C S1.A1 S1.A2 X1.P$37
MISO: R37.2 U$6.12 U$8.3 U$9.D12
MISO_TEENSY: U$12.D12 U$17.14 U$18.12
MOSI_5V: U$6.11 U$25.10
MOSI_5V1: U$17.13 U$18.11 U$29.10
MOSI_TEENSY: R36.2 U$8.2 U$9.D11 U$25.5
MOSI_TEENSY1: U$12.D11 U$29.5
MTK3339_DIN: MTK3339_BREAKOUT.6 U$14.D1(TX1)
MTK3339_DOUT: MTK3339_BREAKOUT.5 U$14.D0(RX1)
MTK3339_FIX: MTK3339_BREAKOUT.4 U$14.D2
N$1: U$6.1 U$11.5
N$2: C6.1 U$11.1 U$11.6
N$3: ON-LED.C R5.1
N$4: C7.1 U$11.8
N$5: LED7.A R17.2
N$6: LED18.A R24.2
N$7: U$6.10 U$25.13
N$8: LED8.A R20.2
N$9: D3.A R6.2 R7.2
N$10: D3.C U$6.4
N$11: C11.2 R8.1 R9.1
N$12: IC2.6 R11.2 RF.1
N$13: R10.1 U$16.7
N$14: R16.1 U$13.7
N$15: C23.1 U$16.6
N$16: CAN_TRANSCEIVER.4 U$14.D4(CANRX)
N$17: CAN_TRANSCEIVER.1 U$14.D3(CANTX)
N$18: CAN_TRANSCEIVER1.4 U$12.D4(CANRX)
N$19: LED5.A R14.2
N$20: U$24.6 U$24.7 U$27.2
N$21: U$23.6 U$23.7 U$26.2
N$22: CAN_TRANSCEIVER1.1 U$12.D3(CANTX)
N$23: U$24.1 U$24.2 U$28.2
N$24: R1.2 R2.2 U$6.6
N$25: U$7.1 U$9.D3(CANTX)
N$26: R30.2 U$7.8
N$27: C8.2 R28.1
N$28: C9.2 R29.1
N$29: LED.C R31.1
N$30: D4.C R46.1
N$31: R33.1 U$8.16
N$32: R33.2 R34.1 U$8.15
N$33: D5.C R48.1
N$34: D6.C R15.1
N$35: C4.1 U$2.P$11
N$36: U$7.4 U$9.D4(CANRX)
N$37: LED.A U$9.D7(RX3)
N$38: R38.2 U$3.2 U$10.WDO
N$39: LED11.C R21.2
N$40: U$3.1 U$9.A1
N$41: LED10.C R32.2
N$42: IC2.1 IC2.2 IMD-OK.A
N$43: LED14.C R45.2
N$44: BMS-OK.C R4.1
N$45: IMD-OK.C R3.2
N$46: LED17.A R26.2
N$47: LED11.A U$15.6
N$48: C22.1 U$13.6
N$49: LED10.A U$15.15
N$50: R42.1 U$9.A0 U$10.WDI
N$51: R39.2 U$35.1
N$52: 5AFUSE.L1 5AFUSE.L2 X1.P$17
N$53: C27.2 U$27.1 U$27.6
N$54: C25.1 U$27.8
N$55: C30.2 U$28.1 U$28.6
N$56: C28.1 U$28.8
N$57: C33.2 U$26.1 U$26.6
N$58: C31.1 U$26.8
N$59: R44.1 U$35.15
N$60: R54.2 U$35.3
N$61: R55.1 U$35.13
N$62: R56.2 U$35.5
N$63: LED14.A U$15.20
N$64: R57.2 U$35.7
N$65: R58.2 U$36.1
N$66: R59.2 U$36.3
N$67: R60.2 U$36.5
N$68: R61.2 U$36.7
N$69: D14.1 Q11.3 Q12.1 R63.2
N$70: LED6.A R64.2
N$71: U$14.GND_2 U$22.-
N$72: D10.A INVERTER_PWR_RELAY.2 Q9.3
N$73: D7.A Q10.3 SOFTWARE_SHUTDOWN_RLY.1
N$74: U$32.1 U$32.2 U$34.2
N$75: U$32.6 U$32.7 U$33.2
N$76: C39.2 U$33.1 U$33.6
N$77: C37.1 U$33.8
N$78: C42.2 U$34.1 U$34.6
N$79: C40.1 U$34.8
N$80: LED4.C R67.1
N$81: LED12.C R68.1
N$82: LED13.C R69.1
N$83: MTK3339_BREAKOUT.2 R70.2
N$84: LED1.A R72.2
N$85: LED9.A R73.2
N$86: LED3.A R74.2
N$87: D20.1 Q1.1 R75.2 R76.2
N$88: Q2.3 R76.1
N$89: D22.C R77.1
N$90: D23.C R79.1
N$91: D24.C R81.1
N$92: D25.C R83.1
N$93: IMD_SHUTDOWN_RLY.4 R85.1
N$94: P1.P$1 U$17.25
N$95: P2.P$1 U$17.26
N$96: C44.1 R87.2
N$97: C43.1 R86.2
N$98: C45.1 R88.2
N$99: CAN_TERM_JMP.2 R89.2
N$100: C57.1 R71.2 R89.1
OKHS: IC2.3 IMD.P$5 MAIN.P$5 R41.1
OKHS1: D4.A D9.C IMD_SHUTDOWN_RLY.COIL+ R18.1 R73.1 X1.P$33
OKHS_READ: R46.2 R47.1 U$18.7
PUMP1-: R88.1 U$21.2 X2.P$2
PUMPCONTROL: LED12.A U$12.A6 U$31.2
PUMPDRIVE: D13.3 R52.2 U$21.1 U$31.7
READ_ACCEL1: U$18.2 U$27.5
READ_ACCEL2: U$18.3 U$28.5
READ_BRAKE: U$18.1 U$26.5
SCK_5V: U$6.13 U$25.11
SCK_5V1: U$17.12 U$18.13 U$29.11
SCK_TEENSY: U$8.4 U$9.D13 U$25.4
SCK_TEENSY1: U$12.D13 U$29.4
SCL: ADXL345_BREAKOUT.9 R27.1 U$14.A5
SDA: ADXL345_BREAKOUT.8 R25.1 U$14.A4
SHUTDOWN_A: 5ASHUTDOWNFUSE.R1 5ASHUTDOWNFUSE.R2 IMD_SHUTDOWN_RLY.6
SHUTDOWN_B: BMS_SHUTDOWN_RLY.6 D24.A IMD_SHUTDOWN_RLY.5 R14.1
SHUTDOWN_B_READ: R81.2 R82.1 U$12.A2
SHUTDOWN_C: BMS_SHUTDOWN_RLY.5 D25.A R17.1 SOFTWARE_SHUTDOWN_RLY.P
SHUTDOWN_C_READ: R83.2 R84.1 U$12.A3
SHUTDOWN_D: D6.A R24.1 SOFTWARE_SHUTDOWN_RLY.S X1.P$5
SHUTDOWN_G: INTERLOCK.P$1 MAIN.P$6 R6.1
SHUTDOWN_H: D1.A D2.C INTERLOCK.P$2 RELAYS.P$1 U$4.COIL+
SHUTDOWN_OUT_READ: R15.2 R22.1 U$18.5
SIGNAL_ACCEL1: ACC1_PD.1 ACC1_PU.1 U$24.5 X1.P$25
SIGNAL_ACCEL2: ACC2_PD.1 ACC2_PU.1 U$24.3 X1.P$24
SIGNAL_BRAKE: BRAKE_PU.1 U$23.5 X1.P$8
SOFTWARE_SHUTDOWN: D16.3 Q10.1 R26.1 R66.1 U$12.A7
TELEMETRY5V: ADXL345_BREAKOUT.1 C18.1 C20.1 C24.1 C35.2 C38.1 C41.1 C58.2 C59.2 CAN_TRANSCEIVER.3 MTK3339_BREAKOUT.8 R70.1 REG1.1 REG3.3 U$13.8 U$14.VIN U$16.8 U$32.8 U$33.4 U$33.7 U$34.4 U$34.7
TEMP_SENSE: CURRENT.P$3 U$6.2
TEMPSENSE: BOARD_TEMP.2 R50.2 U$18.8
TSAL+: MAIN.P$1 U$5.5VOUT+ U$5.6SENSE+
VBAT_RTC: MTK3339_BREAKOUT.3 U$14.VBAT U$22.+_0 U$22.+_1
VCC: C21.2 C55.1 REG1.3 U$15.1
XB8: U$14.D7(RX3) U$15.4
XBDI: U$14.D10(TX2) U$15.3
XBDO: U$14.D9(RX2) U$15.2

## Tracks (layer width: path | path; a pad name or v marks a point on that pad's centre or on a via)
3.3V
  Bottom 0.254: U$14.3.3V 110.36,109.14 R27.2 R25.2
3.3V_MAIN_TEENSY  (via drill 0.35)
  Top 0.254: U$12.3.3V 12.19,127.05 v12.19,131.24 | v25.76,144.07 26.39,144.7 v27.07,144.7
  Bottom 0.254: 22.86,140.13 20.07,137.34 15.49,137.34 14.1,135.94 14.1,133.15 v12.19,131.24 | 22.86,140.13 23.42,140.69 U$29.1 24.5,141.73 25.76,142.99 v25.76,144.07 | v27.07,144.7 28,145.63 U$29.8 | C60.1 22.86,140.12 22.86,140.13
12VIN
  Top 0.508: 87.18,129.34 U$16.2
  Top 2.032: X2.P$1 88.62,146.58 84.71,142.67 84.71,132.95 87.18,130.48 U$16.1 87.18,129.34
12VSUPPLY_DIV  (via drill 0.35)
  Top 0.254: U$23.3 56.77,156.9 55.24,155.37 52.98,155.37 v52.7,155.65 | v40.01,153.34 40.06,153.39 v40.06,155.69 v40.06,155.7
  Bottom 0.254: R13.1 37.46,149.27 40.01,151.82 40.01,152.32 | R23.2 35.36,152.77 39.56,152.77 40.01,152.32 | 40.01,152.32 v40.01,153.34 | C53.2 36.96,158.42 39.68,155.7 v40.06,155.7 40.51,156.14 47.51,156.14 48.01,156.64 51.71,156.64 v52.7,155.65
12VSUPPLY_READ  (via drill 0.35)
  Top 0.254: U$23.2 U$23.1 53.66,158.67 v52.58,158.67 | U$18.4 41.27,147.5 43.81,150.04 45.09,150.04 46.6,151.56 v46.6,151.71 | v44.32,155.37 44.32,156.83 v44.38,156.89
  Bottom 0.254: v46.6,151.71 47.37,152.48 47.37,154.36 46.35,155.37 v44.32,155.37 | v52.58,158.67 50.95,157.05 44.54,157.05 v44.38,156.89
12VUNFUSED
  Top 0.508: 87.18,127.05 U$16.3
  Top 2.032: 5ASHUTDOWNFUSE.L2 5ASHUTDOWNFUSE.L1 77.34,136.07 5ABOARDFUSE.L2 5ABOARDFUSE.L1 83.72,126.29 U$16.4 87.18,127.05
+3V3  (via drill 0.35, 0.38)
  Top 0.254: v47.09,17.53 40.95,17.53 v40.89,17.48 | U$25.8 19.21,15.58 18.54,16.26 | 18.54,16.26 12.32,16.26 v10.41,14.35 10.59,14.35 12.11,12.83 12.11,10.23 C14.1 13.77,9.45 U$25.1 | v21.72,19.81 19.56,19.81 19.05,19.3 19.05,16.76 18.54,16.26 | C15.2 10.15,37.98 v9.53,38.61 | R36.1 R37.1 36.2,7.5 v36.32,7.62
  Bottom 0.254: v47.09,17.53 50.9,13.72 50.9,11.16 U$3.5 46.6,6.86 40.89,6.86 39.88,7.87 36.58,7.87 v36.32,7.62 | v40.89,17.48 38.49,19.88 21.78,19.88 v21.72,19.81 | v9.53,38.61 9.65,38.48 12.59,38.48
  Bottom 0.305: v10.41,14.35 7.62,17.14 U$9.3.3V 12.59,23 12.59,38.48 U$8.6
+5V  (via drill 0.35)
  Top 0.254: U$25.14 15.3,14.99 C13.1 12.46,14.99 v11.81,14.35 | C10.1 32.2,13.47 32.13,13.54 | U$6.5 25.27,14.48 26.48,13.27 31.18,13.27 31.23,13.22 31.24,13.21 31.24,13.11 | U$6.16 U$6.15 | 7.21,44.42 8.66,44.42 v8.76,44.32 | v28.45,23.88 29.46,23.88 31.75,26.16 34.02,26.16 CURRENT.P$1
  Top 0.406: U$7.3 5.08,8.26 3.74,9.59 2.09,9.59 1.27,10.41 1.27,16.76 U$9.VIN | 31.24,13.11 31.24,10.54 U$6.16 31,9.65 v31.63,9.02 35.43,9.02 35.92,8.53 v41.15,8.53 | 31.23,13.22 31.55,13.54 32.13,13.54 34.85,13.54 U$10.VCC 39.98,18.67 39.98,25.3 38.48,26.8 36.47,26.8 CURRENT.P$1
  Top 0.508: ON-LED.A 21.94,37.34 30.99,37.34 32.77,35.56 v32.77,32.64
  Top 0.61: IC1.3 7.21,44.42 9.91,41.73 9.91,40.77 11.43,39.24 20.03,39.24 ON-LED.A
  Bottom 0.254: U$8.8 U$8.7 12.06,39.78 12.06,41.66 | 12.06,42.8 12.06,41.66 12.01,41.72 | U$11.4 31.89,28.01 C5.1 | U$8.9 11.59,43.28 12.06,42.8 | U$8.12 13.09,43.19 12.7,42.8 12.06,42.8 | U$8.1 15.09,40.64 14.07,41.66 12.06,41.66 | R38.1 41.17,8.51 v41.15,8.53 | v8.76,44.32 9.91,43.18 C16.2 10.67,43.06 12.01,41.72 | 12.01,41.72 12.06,41.66 | U$11.7 28.57,23.75 v28.45,23.88
  Bottom 0.305: v11.81,14.35 8.32,10.86
  Bottom 0.406: C5.1 32.51,29.84 34.92,27.43 CURRENT.P$1 | U$9.VIN 2.54,16.64 8.32,10.86 13.46,5.71 23.37,5.71 23.94,6.29 26.99,6.29 29.72,9.02 v31.63,9.02
  Bottom 0.61: IC1.3 5.32,46.32 C3.1 | C5.1 32.77,30.73 v32.77,32.64
+5V1  (via drill 0.35)
  Top 0.254: U$24.8 61.47,149.28 v62.36,148.39 | v55.88,161.34 55.63,161.34 54.23,162.74 U$23.8 54.1,163.43 52.13,163.43 v52.07,163.37 51.69,162.99 47.88,162.99 45.97,161.09 v45.47,161.09 44.45,160.07 43.31,160.07 42.8,159.56 42.8,157.4 43.54,156.66 43.54,152.71 44.81,151.44 v44.81,150.8 44.81,152.68 U$38.P$1 | ACC1_PU.2 65.16,152.2 62.23,152.2 61.47,151.44 U$24.8 | 77.09,154.48 77.09,150.29 74.04,147.24 74.04,138.86 66.67,131.5 63.52,131.5 | 77.09,154.48 77.09,155.25 v77.72,155.88 | R20.1 61.09,133.54 61.09,131.61 | 61.09,131.61 REG.3 | BOARD_TEMP.1 91.24,154.56 v91.69,154.1 | X1.P$27 71.88,158.51 74.76,155.63 75.95,155.63 77.09,154.48 | C19.2 61.09,131.61 | v37.47,180.12 38.62,181.28 51.63,181.28 55.66,177.25 55.66,176.24 v55.95,175.95 55.86,175.86 51.08,175.86 v50.93,176.01 | v41.53,165.02 42.16,164.39 45.17,164.39 v45.34,164.22 | v46.61,138.74 C36.2 45.09,138.74 U$18.16 | C46.2 45.71,141.4 U$18.16 | U$18.16 U$18.15 | U$24.8 61.47,149.44 60.68,148.66 60.68,147.86 61.46,147.09 C51.1 C52.1 | BRAKE_PU.2 59.09,160.06 v58.55,160.6
  Top 0.406: REG.3 62.61,131.5 63.52,131.5 64.9,132.87 64.9,136.83 64.14,137.59 v61.85,137.59 59.31,137.59 57.53,139.37 50.42,139.37 v48.9,140.89 | v9.04,118.9 3.43,113.28 U$12.VIN
  Bottom 0.254: CAN_TRANSCEIVER1.3 27.94,118.67 28.69,119.42 C48.2 C47.2 28.69,125.26 30.61,127.18 | v61.85,137.59 60.71,138.74 U$27.7 60.71,142.29 59.44,143.56 | v44.81,150.8 48.49,147.12 49.72,147.12 U$28.7 51.69,146.99 51.94,147.24 | U$26.4 51.94,151.82 | 51.94,150.04 51.94,151.82 | 51.94,150.04 52.31,150.04 C32.1 | 59.44,143.56 58.55,144.45 57.78,144.45 | 51.94,147.24 51.94,146.86 54.36,144.45 U$28.4 57.78,144.45 | 51.94,147.24 51.94,150.04 | C29.1 57.66,144.58 57.78,144.45 | U$17.18 52.21,174.09 51.52,174.09 50.93,174.69 v50.93,176.01 | U$17.9 59.51,175.35 56.88,175.35 56.28,175.95 v55.95,175.95 55.95,175.96 55.71,176.21 55.71,180.32 54.7,181.33 47.69,181.33 C54.1 | U$26.7 49.76,154.52 51.58,154.52 51.97,154.13 51.97,153.59 51.94,153.56 51.94,151.82 | C26.1 63.25,149.28 v62.36,148.39 63.25,147.5 U$27.4 63.25,145.47 61.85,144.07 60.2,144.07 59.69,143.56 59.44,143.56 | X1.P$29 73.5,161.84 X1.P$28 X1.P$27 | v91.69,154.1 91.44,154.36 83.19,154.36 81.53,156.01 77.85,156.01 v77.72,155.88 | v37.47,180.12 37.47,178.74 38.35,177.85 39.75,177.85 40.26,177.34 40.26,174.17 40.64,173.79 41.02,173.79 41.53,173.28 v41.53,165.02 | v45.34,164.22 45.47,164.1 v45.47,161.09 | 31.59,138.76 33.38,136.98 38.48,136.98 39.12,137.62 45.74,137.62 46.8,138.67 | 31.59,138.76 31.59,143.41 33.02,144.83 33.02,146.35 31.11,148.26 R72.1 | v48.9,140.89 48.9,140.77 46.8,138.67 | v46.61,138.74 46.67,138.67 46.8,138.67 | C50.2 48.52,163.63 48.78,163.89 C49.2 51.55,163.89 v52.07,163.37 | v58.55,160.6 58.55,160.75 57.96,161.34 v55.88,161.34 55.88,162.47 ACC2_PU.2 | 31.59,138.76 30.04,140.32 | 30.04,140.32 28.95,141.41 U$29.14
  Bottom 0.254: C61.1 30.04,140.19 30.04,140.32
  Bottom 0.406: REG.3 60.83,129.72 56.26,129.72 53.72,127.18 30.61,127.18 17.32,127.18 v9.04,118.9
+12V  (via drill 0.55)
  Top 0.61: MAIN.P$7 21.8,30.31 23.88,32.38 23.88,34.54 22.99,35.43 20.95,35.43 v20.57,35.81 19.94,35.81 17.58,33.45 17.27,33.45 3.64,33.45 | POWER.P$1 3.64,33.45 | 3.64,33.45 2.07,35.02 2.07,40.9 3.23,42.06 4.66,42.06 IMD.P$1
  Bottom 0.254: C12.1 19.51,40.83 IC2.8
  Bottom 0.305: C12.1 19.3,37.08 v20.57,35.81
  Bottom 0.61: C2.1 5.7,53.32 IC1.1 2.52,50.14 2.52,46.15 5.38,43.28 IMD.P$1
+12V1  (via drill 0.35, 0.38, 0.55)
  Top 0.254: v19.43,160.96 19.43,161.13 21.04,162.74 25.17,162.74 | 58.45,124.99 58.44,124.99 C17.2 56.78,126.41 55.75,127.43 55.75,129.59 C34.2 | v83.44,149.53 84.71,148.26 v87.63,148.26 | v93.03,148.61 93.03,148.51 93.75,147.79 93.75,145.06 96.39,142.42 v96.39,142.04 | v83.8,160.34 v83.8,158.6 | 25.17,162.74 v27.89,165.46 | INVERTER_PWR_RELAY.1 14.35,147.6 14.35,147.5 | v8.26,165.91 13.59,171.25 v13.59,174.42 | U$37.P$1 52.7,109.91 52.7,111.3 | v32.89,162.36 32.51,162.74 25.17,162.74 | 68.94,153.15 68.94,152.45 v68.63,152.15
  Top 0.508: X1.P$10 65.91,156.88 65.91,155.88 68.64,153.15 68.94,153.15 70.29,153.15 v71.88,151.56
  Top 0.61: v83.44,149.53 83.44,146.23 80.64,143.43 79.14,143.43 X4.P$1 | REG.1 69.22,126.92 69.7,126.92 | 56.92,123.47 53.37,123.47 52.2,124.64 v52.2,129.08
  Top 1.524: INVERTER_PWR_RELAY.P 18.67,156.64 14.35,152.32 14.35,147.5 14.35,113.72 21.46,106.6 51.44,106.6 52.7,107.87 52.7,111.3 52.7,113.21 55.19,115.69 55.19,121.73 56.92,123.47 58.45,124.99 60.32,126.86 60.32,126.92 69.7,126.92 72.36,126.92 5ABOARDFUSE.R1
  Top 2.032: 5ABOARDFUSE.R2 5ABOARDFUSE.R1
  Bottom 0.254: v19.43,160.96 19.51,160.88 INVERTER_PWR_RELAY.P | X1.P$10 65.83,158.59 67.44,160.2 X1.P$34 70.7,161.84 72.29,161.84 72.89,162.45 72.89,162.98 73.54,163.63 74.8,163.63 75.44,162.99 76.9,162.99 77.95,161.95 77.95,160.96 80.74,158.17 U$30.6 83.36,158.17 v83.8,158.6 | D10.C 17.4,153.71 INVERTER_PWR_RELAY.1 16.36,151.69 9.53,151.69 8.38,152.83 8.38,154.74 7.49,155.63 7.49,160.32 8.26,161.09 v8.26,165.91 | SOFTWARE_SHUTDOWN_RLY.2 15.11,177.11 D7.C 13.68,174.33 v13.59,174.42 | U$31.6 111.89,134.54 111.04,135.39 111.04,135.98 110.31,136.7 104.14,136.7 101.98,138.86 100.08,138.86 96.9,142.04 v96.39,142.04 | v93.03,148.61 93,148.64 88.01,148.64 v87.63,148.26 | 83.03,164.34 83.71,165.02 83.71,166.05 82.95,166.8 | 83.03,164.34 82.95,164.26 U$35.10 | U$35.12 82.95,166.8 | 82.95,166.8 83.71,167.56 83.71,168.59 82.95,169.34 | U$35.14 82.95,169.34 | 82.95,169.34 83.71,170.1 83.71,171.13 82.95,171.88 U$35.16 82.58,172.14 U$36.16 81.13,172.14 81.88,172.89 81.88,173.92 81.2,174.6 81.08,174.6 U$36.14 81.13,174.68 81.88,175.43 81.88,176.46 81.14,177.2 81.11,177.2 | U$36.12 81.01,177.2 81.11,177.2 | 81.11,177.2 81.88,177.97 81.88,179 81.13,179.76 U$36.10 | v83.8,160.34 83.95,160.49 83.95,163.42 83.03,164.34 | R23.1 34.67,156.52 34.67,157.91 33.95,158.63 33.95,161.29 v32.89,162.36 | 62.6,156.4 62.48,156.28 D14.3 | R75.1 34.57,174.56 D20.3 31.48,174.17 28.7,174.17 | 28.7,174.17 27.86,173.32 27.86,165.49 v27.89,165.46 | 28.7,174.17 29.15,174.61 29.15,174.69 Q1.2 | Q12.2 58.03,156.96 58.03,155.63 R63.1
  Bottom 0.406: X1.P$10 65.83,156.96 65.27,156.4 62.6,156.4 62.27,156.4 60.63,158.04 59.1,158.04 Q12.2 | C56.1 71.5,130.73 5ABOARDFUSE.R2
  Bottom 0.508: REG.1 66.17,132 73.28,139.12 73.28,150.16 v71.88,151.56
  Bottom 0.61: X4.P$1 75.17,141.03 75.17,133.14 5ABOARDFUSE.R2 | v83.44,149.53 82.93,150.04 79.52,150.04 X3.P$1 | v52.2,129.08 52.2,135.56 REG3.1
BMS_OK  (via drill 0.35, 0.35 pad 0.55)
  Top 0.254: v51.31,153.86 51.56,153.61 54.24,153.61 57.35,156.71 57.35,159.21 57.76,159.63 58.48,159.63 59.05,159.06 62.1,159.06 v62.36,158.8 | v40.89,155.25 41.27,155.63 41.27,160.45 34.66,167.07 v33.77,167.07
  Bottom 0.254: v51.31,153.86 51.31,151.44 49.91,150.04 46.61,150.04 43.31,153.34 43.31,154.23 D5.A | X1.P$31 68.61,162.99 67.15,162.99 66.27,162.1 66.27,161.98 65.66,161.38 65.54,161.38 63.72,159.56 63.12,159.56 v62.36,158.8 | D5.A 40.91,155.26 v40.89,155.25 | R74.1 37.34,154.09 41.13,154.09 D5.A | R19.1 30.8,169.93 Q2.1 31.8,168.07 32.77,168.07 v33.77,167.07 D21.3
BMS_OK_3.3V  (via drill 0.35)
  Top 0.254: v44.03,18.37 41.45,20.95 41.45,25.4 40.13,26.72 v40.13,41.66
  Bottom 0.254: U$3.4 49.97,13.38 44.98,18.37 v44.03,18.37
  Bottom 0.305: IC2.5 26.86,41.78 32.26,41.78 32.77,42.29 39.5,42.29 v40.13,41.66
BMS_OK_10V  (via drill 0.35)
  Top 0.254: BMS-OK.A 22.19,43.69 v28.07,43.69 28.32,43.94 RF.2
  Top 0.305: v17.65,40.26 19.43,42.04 BMS-OK.A
  Bottom 0.305: MAIN.P$4 17.49,25.31 16,26.8 16,35.29 17.65,36.94 v17.65,40.26 | IC2.7 23.37,42.29 24.77,43.69 v28.07,43.69
BMS_OK_READ  (via drill 0.35)
  Top 0.254: v33.66,147.37 33.66,147.5 35.31,149.15 v39.06,149.15 38.89,148.97 38.89,147.01 U$18.6
  Bottom 0.254: R49.1 33.66,148.76 v33.66,147.37 | v39.06,149.15 41.66,149.15 R48.2
BMS_OK_SW
  Bottom 0.254: D8.C BMS_SHUTDOWN_RLY.COIL+ 26.67,179.38 27.88,178.17 27.88,176.37 Q1.3
BMS_PWR_STEP  (via drill 0.35)
  Top 0.254: v26.67,178.23 27.05,177.85 v41.53,177.85
  Top 0.406: v41.53,177.85 43.05,179.38 BMS_SHUTDOWN_RLY.3
  Bottom 0.254: BMS_SHUTDOWN_RLY.COIL- D8.A 26.67,176.57 v26.67,178.23
  Bottom 0.406: D19.A 41.27,177.6 v41.53,177.85
BRAKE_LIGHT  (via drill 0.35)
  Top 0.406: X1.P$9 62.9,157.28 v62.61,157.28
  Bottom 0.406: v62.61,157.28 60.72,159.17 Q12.3
BRAKE_LIGHT_CTRL  (via drill 0.35)
  Top 0.254: v59.56,139.12 60.07,138.61 64.26,138.61 65.41,137.47 65.41,134.93 66.41,133.92 68.08,133.92 69.72,135.56 69.72,140.13 65.15,144.7 65.15,149.78 R62.2 65.11,149.91 63.67,151.35 v62.4,151.35
  Bottom 0.254: v59.56,139.12 59.31,139.37 50.67,139.37 45.21,133.91 19.05,133.91 U$12.D7(RX3) 17.02,131.88 D15.3 | Q11.1 62.12,151.07 v62.4,151.35
CANH  (via drill 0.35)
  Top 0.305: MAIN.P$10 20.38,24.11 12.98,24.11 12.51,24.58 | POWER.P$4 v11.31,25.78 | v11.31,25.78 12.51,24.58 | 3.81,12.19 6.6,14.99 7.87,14.99 8.13,15.24 | R28.2 8.13,14.74 8.13,15.24 | v11.31,25.78 11.31,16.64 10.54,15.88 8.76,15.88 8.13,15.24 | U$1.2 12.59,24.58 12.51,24.58
  Top 0.406: 3.81,12.19 U$7.7
  Bottom 0.406: R8.2 v11.3,25.79 v11.31,25.78
CANH1  (via drill 0.35)
  Top 0.254: X1.P$12 70.71,156.29 X1.P$13 74.99,153.7 X3.P$4 | v88.39,140.39 v90.04,142.04
  Bottom 0.254: CAN_TRANSCEIVER1.7 42.67,117.4 47.5,122.22 | 47.5,122.22 47.98,122.71 50.93,122.71 56.26,128.04 67.82,128.04 68.86,129.08 68.86,132.34 74.45,137.93 74.45,148.13 | 74.45,148.13 74.45,151.78 75.86,153.19 X3.P$4 77.28,155.12 79.63,155.12 85.53,149.21 85.53,146.93 90.04,142.42 v90.04,142.04 90.04,133.4 92.33,131.12 95.7,131.12 98.11,133.53 102.56,133.53 103.44,134.42 CAN_TRANSCEIVER.7 | v88.39,140.39 84.58,136.58 CAN_TERM_JMP.1 | X4.P$4 74.45,148.13 | 47.5,122.22 47.5,122.18 U$40.2
CANL  (via drill 0.35)
  Top 0.305: MAIN.P$9 20.45,26.54 15.88,26.54 15.56,26.86 U$1.1 12.73,26.86 10.03,29.56 10.03,30.48 8.81,31.7 POWER.P$3 | R29.2 8.76,12.58 7.25,14.1 v6.99,14.1 6.86,14.1 5.08,12.32 U$7.6 | v10.41,25.15 10.41,20.7 8.89,19.18 8.89,16.89 7.87,15.88 v7.49,15.88
  Bottom 0.305: v10.41,25.15 10.41,25.4 9.91,25.91 9.91,30.61 8.81,31.7 POWER.P$3 8.38,32.2 8.38,34.79 10.55,36.97 R9.2 | v7.49,15.88 6.99,15.37 v6.99,14.1
CANL1  (via drill 0.35)
  Top 0.254: X3.P$3 74.48,152.58 v74.04,152.58 72.26,154.36 69.09,154.36 67.89,155.55 X1.P$11 67.89,156.23 X1.P$26
  Bottom 0.254: CAN_TRANSCEIVER.6 103.83,132.64 98.11,132.64 95.95,130.48 91.57,130.48 89.28,132.77 89.28,140.57 85.82,144.03 R71.1 85.75,143.96 85.75,144.1 81.34,148.51 77.09,148.51 | 47.48,123.67 47.69,123.88 51.27,123.88 56.09,128.7 67.56,128.7 68.2,129.34 68.2,132.51 74.04,138.35 v74.04,152.58 | 47.48,123.67 42.48,118.67 CAN_TRANSCEIVER1.6 | 77.09,148.51 75.86,149.74 X3.P$3 | X4.P$3 77.09,145.45 77.09,148.51 | U$40.1 47.48,123.67
CHARGE_ENABLE
  Bottom 0.254: R1.1 33.27,40.39 D1.C
  Bottom 0.406: D1.C 27.69,40.39 22.26,34.96 18.91,34.96 17.92,33.97 17.92,31.64 19.21,30.35 MAIN.P$2
COOLINGSENSE  (via drill 0.35)
  Top 0.254: U$32.3 90.81,113.78 90.81,114.73 94.93,118.86 98.49,118.86 99.19,119.56 99.19,120.29 | v100.08,135.43 101.09,135.43 102.87,133.66 102.87,132 102.3,131.43 99.89,131.43 99.19,130.73 99.19,120.29 | v100.19,119.28 99.19,120.29
  Bottom 0.254: R43.2 100.08,135.82 v100.08,135.43 101.46,135.43 R16.2 | J5.2 101.47,118 v100.19,119.28
COOLINGSENSE_FILT  (via drill 0.35)
  Top 0.254: v99.95,112.45 99.31,111.81 77.6,111.81 73.66,115.75 70.74,115.75 66.67,119.81 63.75,119.81 62.1,121.46 U$14.A12
  Bottom 0.254: U$34.5 82.55,119.43 83.69,120.57 83.69,123.11 83.19,123.62 63.88,123.62 U$14.A12 | J5.1 101.08,113.58 v99.95,112.45
CS1_5V  (via drill 0.35)
  Top 0.254: v38.15,138.09 37.47,138.78 U$18.10 | v33.15,140.64 32.26,141.53 v30.86,141.53
  Bottom 0.254: v33.15,140.64 35.7,138.09 v38.15,138.09 | v30.86,141.53 30.57,141.53 29.71,142.38 U$29.13
CS1_TEENSY
  Bottom 0.254: U$29.2 22.57,142.38 18.8,138.61 U$12.D9(RX2)
CS2_5V  (via drill 0.35)
  Top 0.254: v56.97,174.26 56,174.26 52.73,170.99 v52.73,170.87 | v52.07,165.28 52.07,165.15 51.05,164.13 47.21,164.13 45.97,162.9 44.54,162.9 42.14,160.5 42.14,157.16 42.88,156.42 42.88,152.08 v43.91,151.05 | v33.42,143.18 v30.84,143.18
  Bottom 0.254: U$17.11 57.41,173.93 57.07,174.26 v56.97,174.26 | v52.73,170.87 52.07,170.21 v52.07,165.28 | U$29.12 29.82,143.03 29.97,143.18 v30.84,143.18 | v43.91,151.05 43.65,150.8 43.65,149.15 42.64,148.13 35.81,148.13 34.82,147.14 34.82,144.58 v33.42,143.18
CS2_TEENSY
  Bottom 0.254: U$29.3 22.33,143.03 20.45,141.15 U$12.D10(TX2)
CS_LTC6820  (via drill 0.4)
  Top 0.305: v15.88,6.73 17.46,5.14 28.13,5.14 U$9.D10(TX2)
  Bottom 0.254: 12.76,9.84 12.76,15.05 11.56,16.26
  Bottom 0.305: v15.88,6.73 12.76,9.84 | 11.56,16.26 11.56,20.07 13.08,21.59 U$8.5
CS_MCP3208_3.3V
  Top 0.254: U$9.D9(RX2) 26.35,4.38 15.81,4.38 13.59,6.6 13.59,7.24 14.48,8.13 15.37,8.13 15.96,8.73 U$25.2
CUR_SENSE
  Bottom 0.254: CURRENT.P$2 34.87,22.75 34.33,22.21 32.84,22.21 31.56,23.5 31.11,23.5 28.57,26.04 28.57,26.98 U$11.2
CURRENTSENSE2  (via drill 0.35)
  Top 0.254: U$19.3 101.4,158.34 101.4,159.39 100.56,160.22 92.05,160.22 v91.82,160.45
  Top 1.27: U$13.2 101.31,169.92 U$13.1
  Top 2.032: U$20.3 100.2,172.52 102.18,170.54 U$13.1 102.18,169.9 101.59,169.3 101.31,169.58 101.31,169.92
  Top 2.54: U$19.3 101.37,156.39 | U$21.3 101.47,142.42 104.52,145.47 104.52,159.54 | 104.42,159.44 104.42,159.79
  Top 3.048: 101.37,156.39 104.42,159.44 104.52,159.54
  Top 3.302: U$13.1 104.42,167.68 104.42,159.79
  Bottom 0.254: U$20.3 99.95,172.52 101.65,174.22 101.65,178.69 100.34,180.01 C44.2 | U$21.3 99.44,142.54 101.52,144.62 101.52,152.35 101.03,152.84 99.52,152.84 98.37,151.69 C45.2 | v91.82,160.45 92.19,160.08 C43.2
DASH11_READ
  Bottom 0.254: R77.2 R78.1 5.33,145.58 U$12.A0
DASH12_READ
  Bottom 0.254: R79.2 R80.1 6.23,141.15 U$12.A1
DASH_1_EXTERN  (via drill 0.35)
  Top 0.254: v77.85,166.6 77.85,169.09 78.98,170.22 R44.2
  Bottom 0.254: X1.P$1 74,167.62 75.69,167.62 76.33,166.98 77.47,166.98 v77.85,166.6
DASH_1_INTER  (via drill 0.35)
  Top 0.254: v90.42,178.1 89.28,178.1 86.49,180.9 82.17,180.9 79.76,178.49 78.61,178.49 73.11,173 72.17,173 71.31,172.14 69.98,172.14 67.73,174.38 v67.72,174.38
  Bottom 0.254: R39.1 90.68,177.85 v90.42,178.1 | v67.72,174.38 61.68,180.43 U$17.1
DASH_2_EXTERN
  Top 0.254: X1.P$2 71.85,169.03 75.99,169.03 R55.2
DASH_2_INTER  (via drill 0.35)